# Altium PCB SourceFollower_SOT23_Simple.PcbDoc
Units mm, origin at the board's own origin, x right, y up, seen from the top; angles counter-clockwise.
Board outline 40 x 8 mm, 2 copper layers (Top Layer, Bottom Layer); 14 components, 8 nets, 34 pads, 4 vias.
Unrouted connection lines stored in the file: 19.
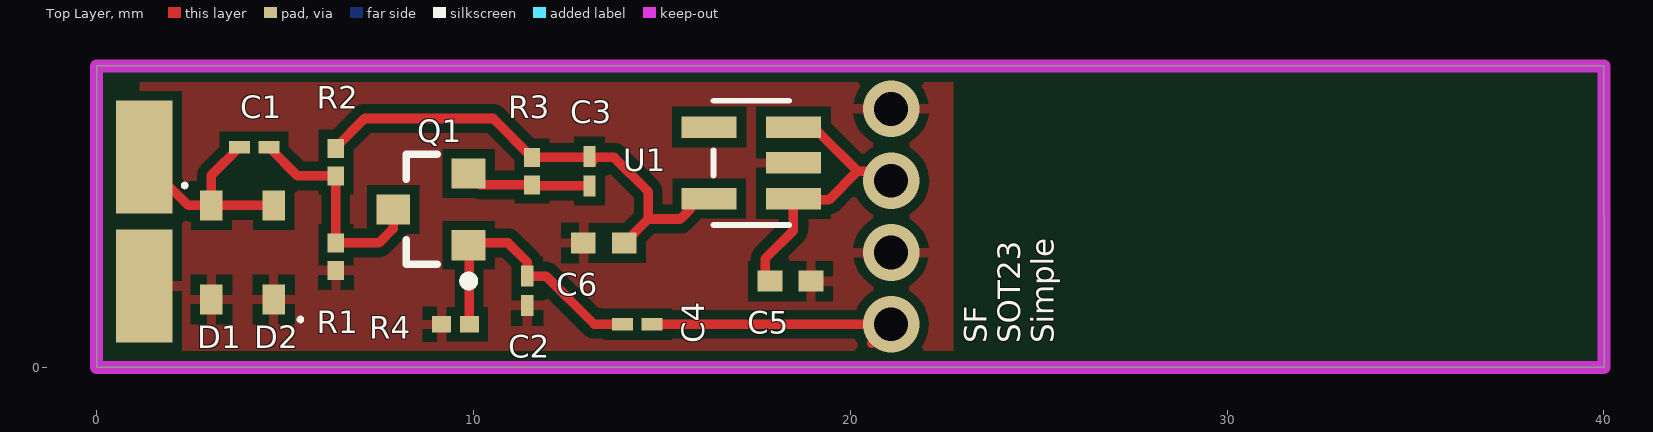
[diagram p0: Top Layer view]
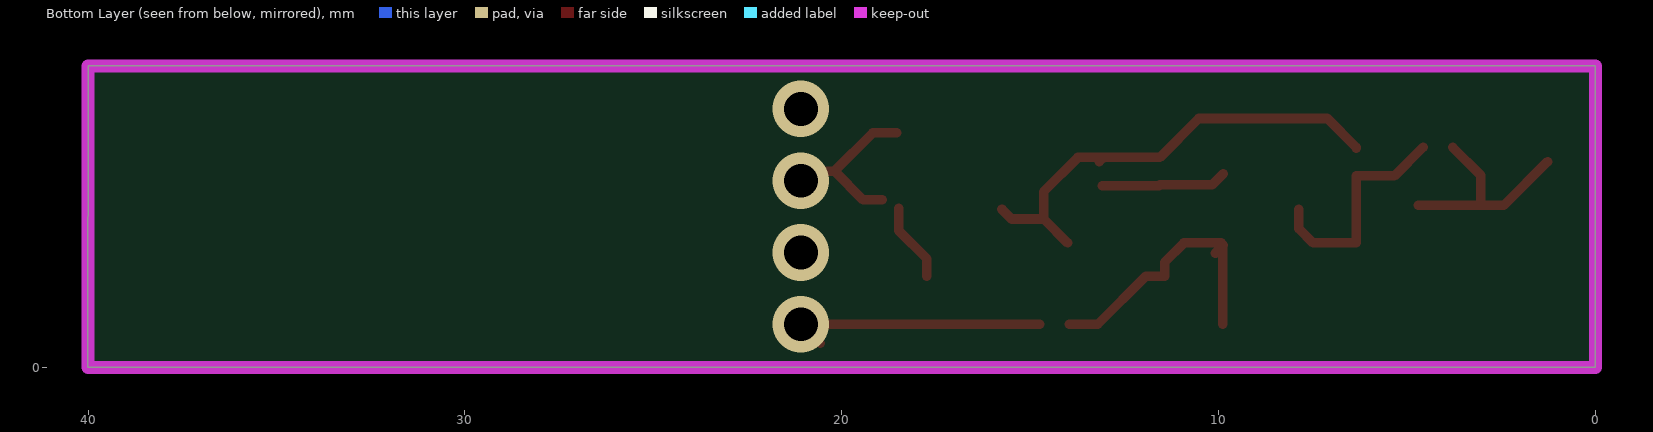
[diagram p1: Bottom Layer view, seen from below]

## Layer stack, top to bottom
Top Solder: solder mask 0.0102, Solder Resist, Dk 3.5
Top Layer: signal copper 0.0356
Dielectric 1: dielectric 0.32, FR-4, Dk 4.8
Bottom Layer: signal copper 0.0356
Bottom Solder: solder mask 0.0102, Solder Resist, Dk 3.5

## Board outline
0,0 0,8 40,8 40.005,0

## Design rules (kind name [scope] priority, off if disabled: settings)
Clearance [All] p1: gap=0.254 ignorepadtopadclearanceinfootprint=FALSE except(0: Arc-Hole Track-Hole SMDPad-Hole THPad-Hole Via-Hole Fill-Hole Poly-Hole Region-Hole Text-Hole)
PolygonConnect [All] p1: connectstyle=Relief reliefconductorwidth=0.254 reliefentries=4 polygonreliefangle="90 Angle" airgapwidth=0.254
RoomDefinition SourceFollower_FET_SOT23_Simple [InComponentClass('SourceFollower_FET_SOT23_Simple')] p1: confinementstyle=ConfineIn formatcopy=TRUE lockcomponents=FALSE outline 0,0 40.005,0 40.005,8.001 0,8.001
RoutingVias [All] p1: holewidth=0.711 width=1.27 viastyle="Through Hole" minholewidth=0.711 minwidth=1.27 maxholewidth=0.711 maxwidth=1.27
SolderMaskExpansion [All] p1: expansion=0.102
Width [All] p1: maxlimit=0.254 minlimit=0.254 preferedwidth=0.254
30 further rules are at their usual default settings.

## Components (designator, comment, footprint, x,y, rotation, side; value= is the part's Value field where it differs from the comment)
C1 "Part Number: C0201C270J3GACTU" C0201 4.181,5.842 r0 top value=Value
C2 "Part Number: C0201C270J3GACTU" C0201 11.43,2.032 r90 top value=Value
C3 "Part Number: C0201C270J3GACTU" C0201 13.081,5.207 r90 top value=Value
C4 "Part Number: C0201C270J3GACTU" C0201 14.351,1.143 r180 top value=Value
C5 "Part Number: CC0402KRX7R6BB104" YAG_CC0402 18.415,2.286 r180 top value=Value
C6 "Part Number: CC0402KRX7R6BB104" YAG_CC0402 13.462,3.302 r0 top value=Value
D1 "BAT15-03W" INF-SOD323_V 3.048,3.048 r0 top
D2 "BAT15-03W" INF-SOD323_V 4.699,3.048 r180 top
Q1 "MMBFJ309LT1" ONSC-SOT-23-3-318-08_V 8.874,4.191 r180 top
R1 "Part Number: RC0201FR-0718KL" RES_RC0201_P6XP3 6.35,2.936 r90 top value=Value
R2 "Part Number: RC0201FR-0718KL" RES_RC0201_P6XP3 6.35,5.446 r90 top value=Value
R3 "Part Number: RC0201FR-0718KL" RES_RC0201_P6XP3 11.557,5.207 r90 top value=Value
R4 "Part Number: RC0201FR-0718KL" RES_RC0201_P6XP3 9.525,1.143 r0 top value=Value
U1 "Part Number: LP5907MFX-3.3/NOPB" DBV5 17.374,5.426 r180 top value=Value

## Footprints (in the part's own frame and the unit in brackets; to place one, negate y for a bottom-side part, rotate by r counter-clockwise, add the part's x,y. Pads: shape width x height; smd on the part's side, far side on the other; paste and mask are expansions set on the pad)
C0201 [mil]
  rect 21.78x13 smd paste+0 mask+0: 1(-15.39,0) 2(15.39,0)
  body extent 0,0 10,10, height 10
DBV5 [mil]
  rect 57.56x22.36 smd paste+0 mask+0: 1(-44,37.4) 2(-44,0) 3(-44,-37.4) 4(44,-37.4) 5(44,37.4)
  silkscreen extent -40,-65 40,65, body extent 0,0 10,10, height 10
INF-SOD323_V [mm] "SOD, 2-Leads, Body 1.7x1.25 mm"
  rect 0.6x0.8 smd: 1(0,1.25) 2(0,-1.25)
  silkscreen extent -0.76,1.73 -0.66,1.83, body extent -0.63,-0.85 0.63,0.85, height 1.1
ONSC-SOT-23-3-318-08_V [mm] "SOT23, 3-Leads, Body 2.92x1.3mm, Pitch 0.95mm"
  rect 0.9x0.8 smd: 1(-1,0.95) 2(-1,-0.95) 3(1,0)
  silkscreen extent -1.13,-1.46 0.65,2.02, body extent -0.65,-1.46 0.65,1.46, height 1.11
RES_RC0201_P6XP3 [mm]
  rect 0.503x0.43 smd paste+0 mask+0: 1(-0.366,0) 2(0.366,0)
  body extent 0,0 0.25,0.25, height 0.25
YAG_CC0402 [mil]
  rect 25.78x22 smd paste+0 mask+0: 1(-21.39,0) 2(21.39,0)
  body extent 0,0 10,10, height 10

## Part data
C1 C2 C3 C4: library part C0201C270J3GACTU, "No Description Available", Built_By=EMA_UL_Team, Copyright="Copyright (C) 2018 Accelerated Designs. All rights reserved", Manufacturer_Part_Number=C0201C270J3GACTU, RefDes=RefDes, Type=DEV, Vendor=Kemet
C5 C6: library part CC0402KRX7R6BB10, "No Description Available", Manufacturer_Part_Number=CC0402KRX7R6BB104, Built_By=EMA_UL_Team, Copyright="Copyright (C) 2018 Accelerated Designs. All rights reserved", RefDes=RefDes, Type=DEV, Vendor=Yageo
D1 D2: "Single Silicon Schottky Diode, 110 mA IF Max, SOD32, Green", Manufacturer=Infineon, Supplier Part Number 1=N/A, ComponentLink1Description="Manufacturer URL", ComponentLink1URL=http://www.infineon.com/, ComponentLink2Description=Datasheet, ComponentLink2URL=http://www.infineon.com/dgdl/bat15series.pdf?folderId=db3a304314dca3890114ff6812070b44&fileId=db3a304314dca3890114ff6b74ca0b48&location=en.Products.RF.RF_Mixer___Detector_Schottky_Diodes.DATASHEET.bat15series.pdf, ComponentLink3Description="Package Specification", ComponentLink3URL=http://www.infineon.com/dgdl/SOD323-Package_Overview.pdf?folderId=db3a30431936bc4b011952aab84f3bbe&fileId=db3a30431936bc4b011952beed653be3, Configuration=Single, CT (typ)="0.26 pF", DatasheetVersion=Jun-2011, Green=yes, Group="RF Mixer", IF (max)="110 mA", Mounting Technology="Surface Mount", PackageDescription="2-Pin Small Outline Diode Package, 1.25 x 1.7 mm Body", PackageReference=SOD323, PartNumber=BAT15-03W, Supplier 1=Mouser, VF (typ)="0.23 V", VR (max)="4 V"
Q1: "JFET - VHF / UHF Amplifier Transistor, N-Channel, 3-Pin SOT-23, Tape and Reel", Manufacturer="On Semiconductor", Supplier Part Number 1=MMBFJ309LT1OSCT-ND, Channel Polarity="N Channel", Ciss Max (pF)=5, ComponentLink1Description="Manufacturer URL", ComponentLink1URL=http://www.onsemi.com/, ComponentLink2Description=Datasheet, ComponentLink2URL=http://www.onsemi.cn/pub_link/Collateral/MMBFJ309LT1-D.PDF, ComponentLink3Description="Package Specification", ComponentLink3URL=http://www.onsemi.cn/pub_link/Collateral/318-08.PDF, Crss Max (pF)=2.5, DatasheetVersion="Rev. 7", IDSS Max (uA)=30000, IDSS Min (uA)=12000, Mounting Technology="Surface Mount", PackageDescription="3-Pin Small Outline Transistor, Body 2.92 x 1.3 mm, Pitch 0.95 mm", PackageReference=SOT-23-3-318-08, PackageVersion="Rev. AP, 11/2009", Packing="Tape and Reel", PartNumber=MMBFJ309LT1, Supplier 1=Digi-Key, V(BR)GSS Min (V)=25
R1 R2 R3 R4: library part RC0201FR-0718KL, "No Description Available", Built_By=EMA_Anthony, Copyright="Copyright (C) 2018 Accelerated Designs. All rights reserved", Manufacturer_Part_Number=RC0201FR-0718KL, RefDes=RefDes, Type=DEV, Vendor=Yageo
U1: library part LP5907MFX-3.3/NO, "No Description Available", Manufacturer_Part_Number=LP5907MFX-3.3/NOPB, Built_By=EMA_UL_Team, Copyright="Copyright (C) 2018 Accelerated Designs. All rights reserved", RefDes=RefDes, Type=DEV, Vendor="Texas Instruments"

## Free pads (board coordinates)
  rect 1.5x3 smd: 5(1.27,2.159) 5(1.27,5.588)

## Via types
v1: diameter 1.5, hole 0.9, Top Layer to Bottom Layer, 4 vias

## Nets (pads, with @x,y where several pads share a name; then routed paths per layer and width w, separated by ;. In a path a pad name is that pad's centre, name@x,y a point inside that pad or via, vN(x,y) a via of type N, cw(c..) or ccw(c..) an arc to the next point about the centre after c; other vN are vias at no path point)
GND: C2.1 C5.1 C6.1 D1.2 D2.1 pad.5@1.27,2.159 R1.1 R4.1 U1.2
  other v1: 21.082,3.048 21.082,6.858
NetC1_2: C1.2 Q1.3 R1.2 R2.1
NetC2_2: C2.2 C4.2 Q1.1 R4.2
NetC3_1: C3.1 Q1.2 R3.1
"RF In": C1.1 D1.1 D2.2 pad.5@1.27,5.588
"RF Out": C4.1
  other v1: 21.082,1.143
VCC: C5.2 U1.1 U1.3
  other v1: 21.082,4.953
VOUT: C3.2 C6.2 R2.2 R3.2 U1.5
pads on no net: U1.4
copper on no net: | length 47.6
  Top Layer w0.254: 1.27,5.461 2.433,4.298 3.048,4.298 ; 3.79,5.842 3.048,5.1 3.048,4.298 ; 4.572,5.842 5.334,5.08 6.35,5.08 6.35,3.302 7.493,3.302 7.874,3.683 7.874,4.191 ; 4.699,4.298 3.048,4.298 ; 6.35,5.812 6.35,5.842 7.112,6.604 10.526,6.604 11.557,5.573 13.056,5.573 ; 9.874,5.141 10.174,4.841 11.557,4.841 ; 9.891,1.143 9.891,3.224 ; 10.082,3.033 9.874,3.241 9.935,3.302 10.922,3.302 11.43,2.794 11.43,2.423 11.928,2.423 13.208,1.143 13.96,1.143 ; 11.582,4.816 13.081,4.816 ; 13.168,5.461 13.056,5.573 ; 14.005,3.302 14.64,3.937 ; 14.742,1.143 16.383,1.143 20.447,1.143 ; 15.748,4.191 15.494,3.937 14.64,3.937 ; 17.745,2.413 17.745,2.886 18.491,3.632 18.491,4.216 ; 18.542,6.223 19.177,6.223 20.193,5.207 ; 18.923,4.445 19.431,4.445 20.193,5.207 ; 20.447,5.207 20.32,5.207 20.193,5.207 ; 20.574,0.635 21.082,1.143 ; 13.056,5.573 13.731,5.573 14.64,4.664 14.64,3.937

## Polygon pours and split planes (outlines as drawn)
GND on Top Layer "Top Layer-GND" (solid, pour order 2): 22.733,0 22.733,8.001 1.143,8.001 1.143,0

## Keep-outs
Keep-Out Layer:
  the board outline again, w0.35

## Silkscreen, mask and mechanical layers (free items; w line width, h text height)
Top Overlay:
  text "SF" at 23.622,0.635 h0.6 r90
  text "SOT23" at 24.511,0.635 h0.6 r90
  text "Simple" at 25.4,0.635 h0.6 r90